# Altium PCB micromicroUSBuart_25x25.PcbDoc
Units mm, origin at the board's own origin, x right, y up, seen from the top; angles counter-clockwise.
Board outline 25.65 x 25.65 mm, 2 copper layers (Top Layer, Bottom Layer); 5 components, 5 nets, 33 pads, 0 vias.
Unrouted connection lines stored in the file: 5.
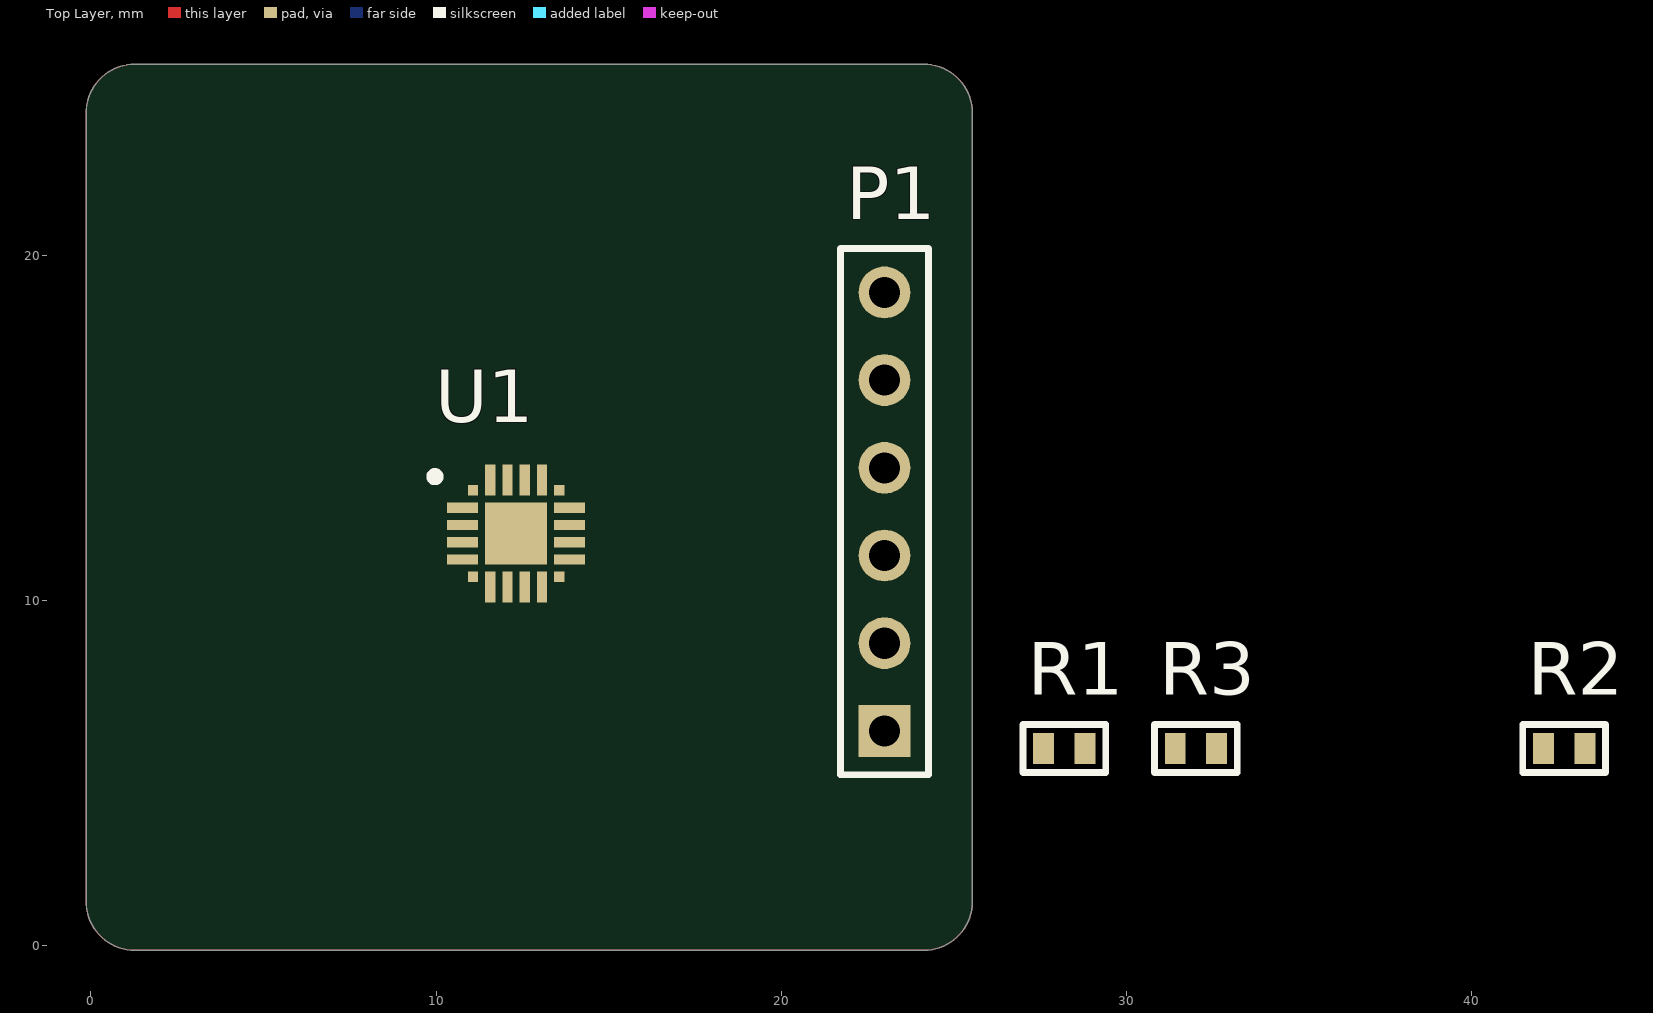
[diagram p0: Top Layer view]
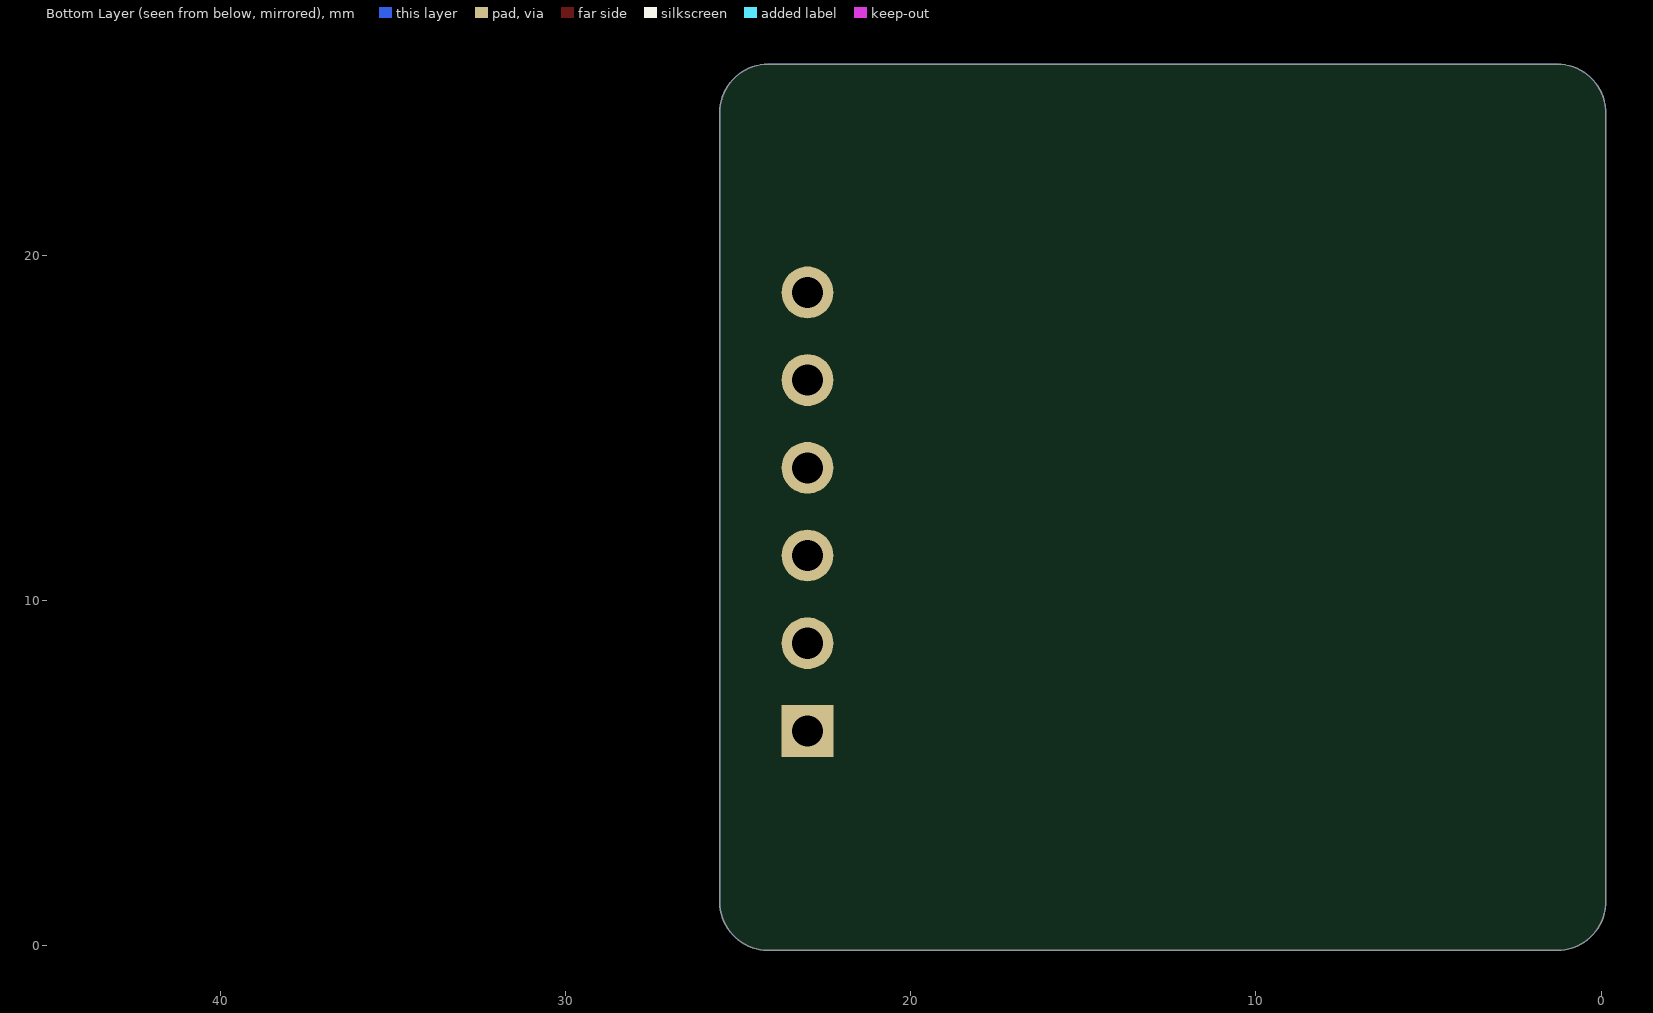
[diagram p1: Bottom Layer view, seen from below]

## Layer stack, top to bottom
Top Solder: solder mask 0.0102, Solder Resist, Dk 3.5
Top Layer: signal copper 0.0356
Dielectric 1: dielectric 0.32, FR-4, Dk 4.8
Bottom Layer: signal copper 0.0356
Bottom Solder: solder mask 0.0102, Solder Resist, Dk 3.5

## Board outline
-0.127,1.27 -0.127,24.13 cw(c1.27,24.13) 1.27,25.527 24.13,25.527 cw(c24.13,24.13) 25.527,24.13 25.527,1.27 cw(c24.13,1.27) 24.13,-0.127 1.27,-0.127 cw(c1.27,1.27)

## Design rules (kind name [scope] priority, off if disabled: settings)
Clearance [All] p1: gap=0.254 ignorepadtopadclearanceinfootprint=FALSE except(0: Arc-Hole Track-Hole SMDPad-Hole THPad-Hole Via-Hole Fill-Hole Poly-Hole Region-Hole Text-Hole)
PolygonConnect [All] p1: connectstyle=Relief reliefconductorwidth=0.254 reliefentries=4 polygonreliefangle="90 Angle" airgapwidth=0.254
RoutingVias [All] p1: holewidth=0.711 width=1.27 viastyle="Through Hole" minholewidth=0.711 minwidth=1.27 maxholewidth=0.711 maxwidth=1.27
SolderMaskExpansion [All] p1: expansion=0.102
Width [All] p1: maxlimit=6.254 minlimit=0.254 preferedwidth=0.254
30 further rules are at their usual default settings.

## Components (designator, comment, footprint, x,y, rotation, side; value= is the part's Value field where it differs from the comment)
P1 "Header 6" HDR1X6 22.987,6.223 r90 top
R1 "1k 0603 1%" R0603 28.194,5.715 r0 top value=1k
R2 "100K 0603 1%" R0603 42.672,5.715 r0 top value=100K
R3 "220K 0603 1%" R0603 32.004,5.715 r0 top value=100K
U1 "CP2102N" QFN20_SILABS 12.319,11.938 r0 top

## Footprints (in the part's own frame and the unit in brackets; to place one, negate y for a bottom-side part, rotate by r counter-clockwise, add the part's x,y. Pads: shape width x height; smd on the part's side, far side on the other; paste and mask are expansions set on the pad)
HDR1X6 [mm] "Connector; Header; 6 Position"
  rect 1.5x1.5 hole 0.9: 1(0,0)
  round 1.5 hole 0.9: 2(2.54,0) 3(5.08,0) 4(7.62,0) 5(10.16,0) 6(12.7,0)
  silkscreen extent -1.27,-1.27 13.97,1.27
QFN20_SILABS [mm] "SiLabs CP2102N QFN footprint"
  rect 0.3x0.3 smd: 1(-1.25,1.25) 6(-1.25,-1.25) 11(1.25,-1.25) 16(1.25,1.25)
  rect 0.9x0.3 smd: 2(-1.55,0.75) 3(-1.55,0.25) 4(-1.55,-0.25) 5(-1.55,-0.75) 12(1.55,-0.75) 13(1.55,-0.25) 14(1.55,0.25) 15(1.55,0.75)
  rect 0.3x0.9 smd: 7(-0.75,-1.55) 8(-0.25,-1.55) 9(0.25,-1.55) 10(0.75,-1.55) 17(0.75,1.55) 18(0.25,1.55) 19(-0.25,1.55) 20(-0.75,1.55)
  rect 1.8x1.8 smd: 21(0,0)
  silkscreen extent -2.47,1.53 -2.22,1.77
R0603 [mm]
  rect 0.6x0.9 smd: 1(-0.6,0) 2(0.6,0)
  silkscreen extent -1.2,-0.7 1.2,0.7

## Part data
P1: "Header, 6-Pin", LatestRevisionDate=17-Jul-2002, LatestRevisionNote="Re-released for DXP Platform.", Publisher="Altium Limited"
R1: library part "RES 1k 0603", Case=0603, Tolerance=1%, Publisher=iv
R2: library part "RES 100K 0603", Case=0603, Tolerance=1%, Publisher=iv
R3: library part "RES 100K 0603", "100K 0603 1%", Case=0603, Tolerance=1%, Publisher=iv
U1: library part CP2102N-QFN20, "USB-UART, crystalles", Case/Package=QFN, Manufacturer 1="Silicon Labs", Manufacturer Part Number 1=CP2102N-A01-GQFN20, Max Operating Temperature=85°C, Max Supply Voltage=3.6V, Min Operating Temperature=-40°C, Min Supply Voltage=3V, Supplier Part Number 1=336-3692-ND, ComponentLink1Description=http://www.farnell.com/datasheets/2060533.pdf, ComponentLink1URL=http://www.farnell.com/datasheets/2060533.pdf, ComponentLink2Description=http://www.farnell.com/datasheets/2245279.pdf, ComponentLink2URL=http://www.farnell.com/datasheets/2245279.pdf, ComponentLink3Description=http://www.silabs.com/documents/public/data-sheets/cp2102n-datasheet.pdf, ComponentLink3URL=http://www.silabs.com/documents/public/data-sheets/cp2102n-datasheet.pdf, Number of Pins=20, Pricing 1="1=1.33, 25=1.2808, 100=1.2317, 1000=1.1526 (USD)", REACH SVHC=Unknown, Stock 1=13531, Supplier 1=Digi-Key

## Nets (pads, with @x,y where several pads share a name; then routed paths per layer and width w, separated by ;. In a path a pad name is that pad's centre, name@x,y a point inside that pad or via, vN(x,y) a via of type N, cw(c..) or ccw(c..) an arc to the next point about the centre after c; other vN are vias at no path point)
GND: P1.1 R3.1 U1.12
NetP1_2: P1.2 R1.1
NetP1_5: P1.5 U1.16
NetP1_6: P1.6 U1.15
NetR2_1: R2.1 R3.2
pads on no net: P1.3 P1.4 R1.2 R2.2 U1.1 U1.2 U1.3 U1.4 U1.5 U1.6 U1.7 U1.8 U1.9 U1.10 U1.11 U1.13 U1.14 U1.17 U1.18 U1.19 U1.20 U1.21

## Polygon pours and split planes (outlines as drawn)
GND on Bottom Layer "Bottom Layer-GND" (solid, shelved, pour order 1): -0.127,1.27 -0.127,24.13 cw(c1.27,24.13) 1.27,25.527 24.13,25.527 cw(c24.13,24.13) 25.527,24.13 25.527,1.27 cw(c24.13,1.27) 24.13,-0.127 1.27,-0.127 cw(c1.27,1.27)
GND on Top Layer "Top Layer-GND" (solid, shelved, pour order 0): -0.127,1.27 -0.127,24.13 cw(c1.27,24.13) 1.27,25.527 24.13,25.527 cw(c24.13,24.13) 25.527,24.13 25.527,1.27 cw(c24.13,1.27) 24.13,-0.127 1.27,-0.127 cw(c1.27,1.27)

## Silkscreen, mask and mechanical layers (free items; w line width, h text height)
Mechanical 1:
  lines w0.254: 0,13.081 0,24.13 cw(c1.27,24.13) 1.27,25.4 ; 0,13.208 0,1.27 ccw(c1.27,1.27) 1.27,0 24.13,0 ccw(c24.13,1.27) 25.4,1.27 25.4,24.13 ccw(c24.13,24.13) 24.13,25.4 ; 1.397,25.4 24.257,25.4

## Dimensions
1.397,25.4 to 1.27,0 on Mechanical 13
0,24.13 to 25.4,24.13 on Mechanical 13